# Altium PCB 50AN Digi.PcbDoc
Units mm, origin at the board's own origin, x right, y up, seen from the top; angles counter-clockwise.
Board outline 64.8 x 52.21 mm, 2 copper layers (Top Layer, Bottom Layer), stack 1.651 mm thick; 36 components, 42 nets, 186 pads, 22 vias.
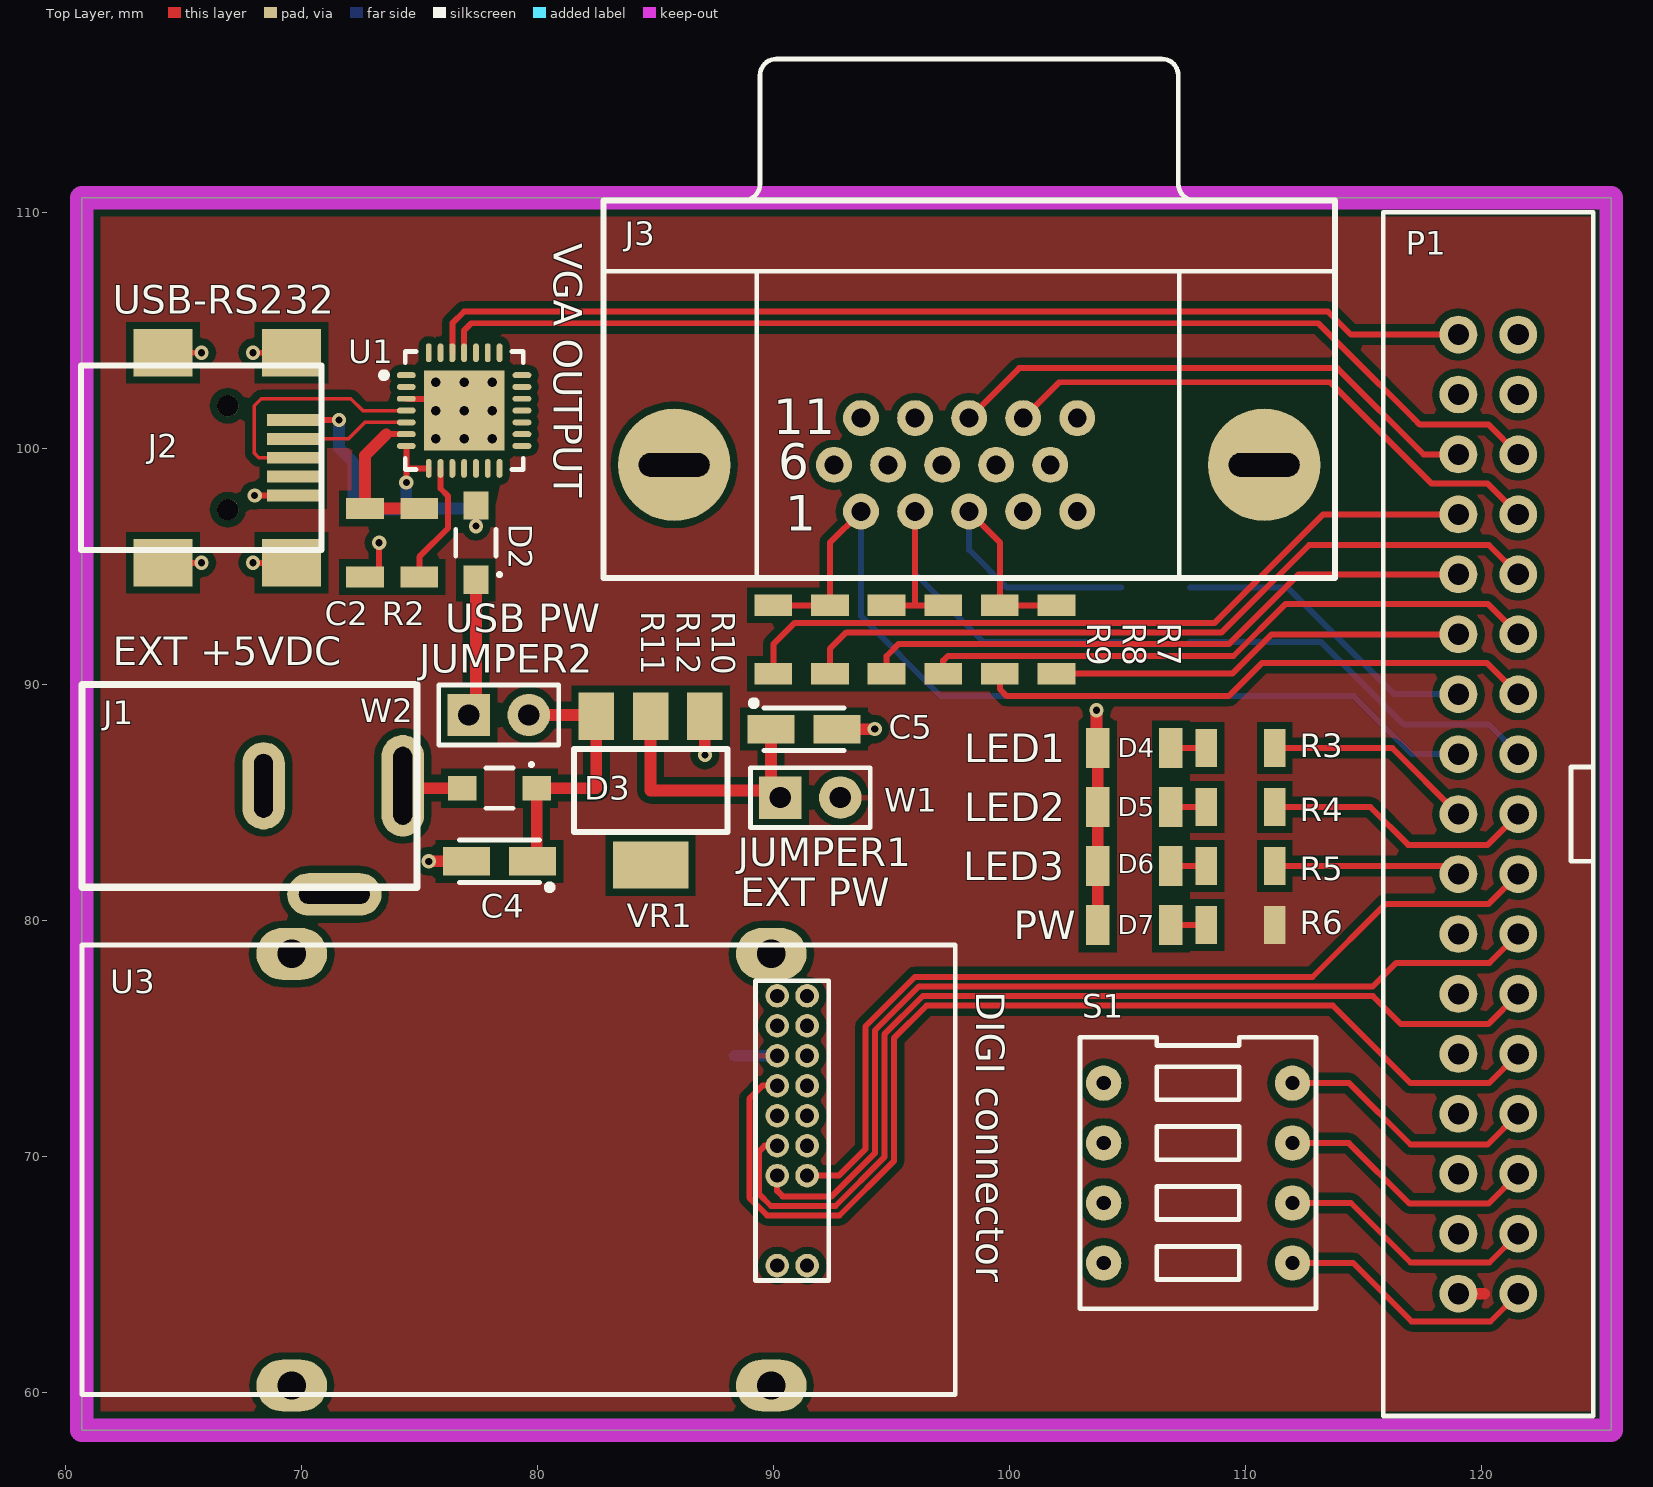
[diagram p0: Top Layer view]
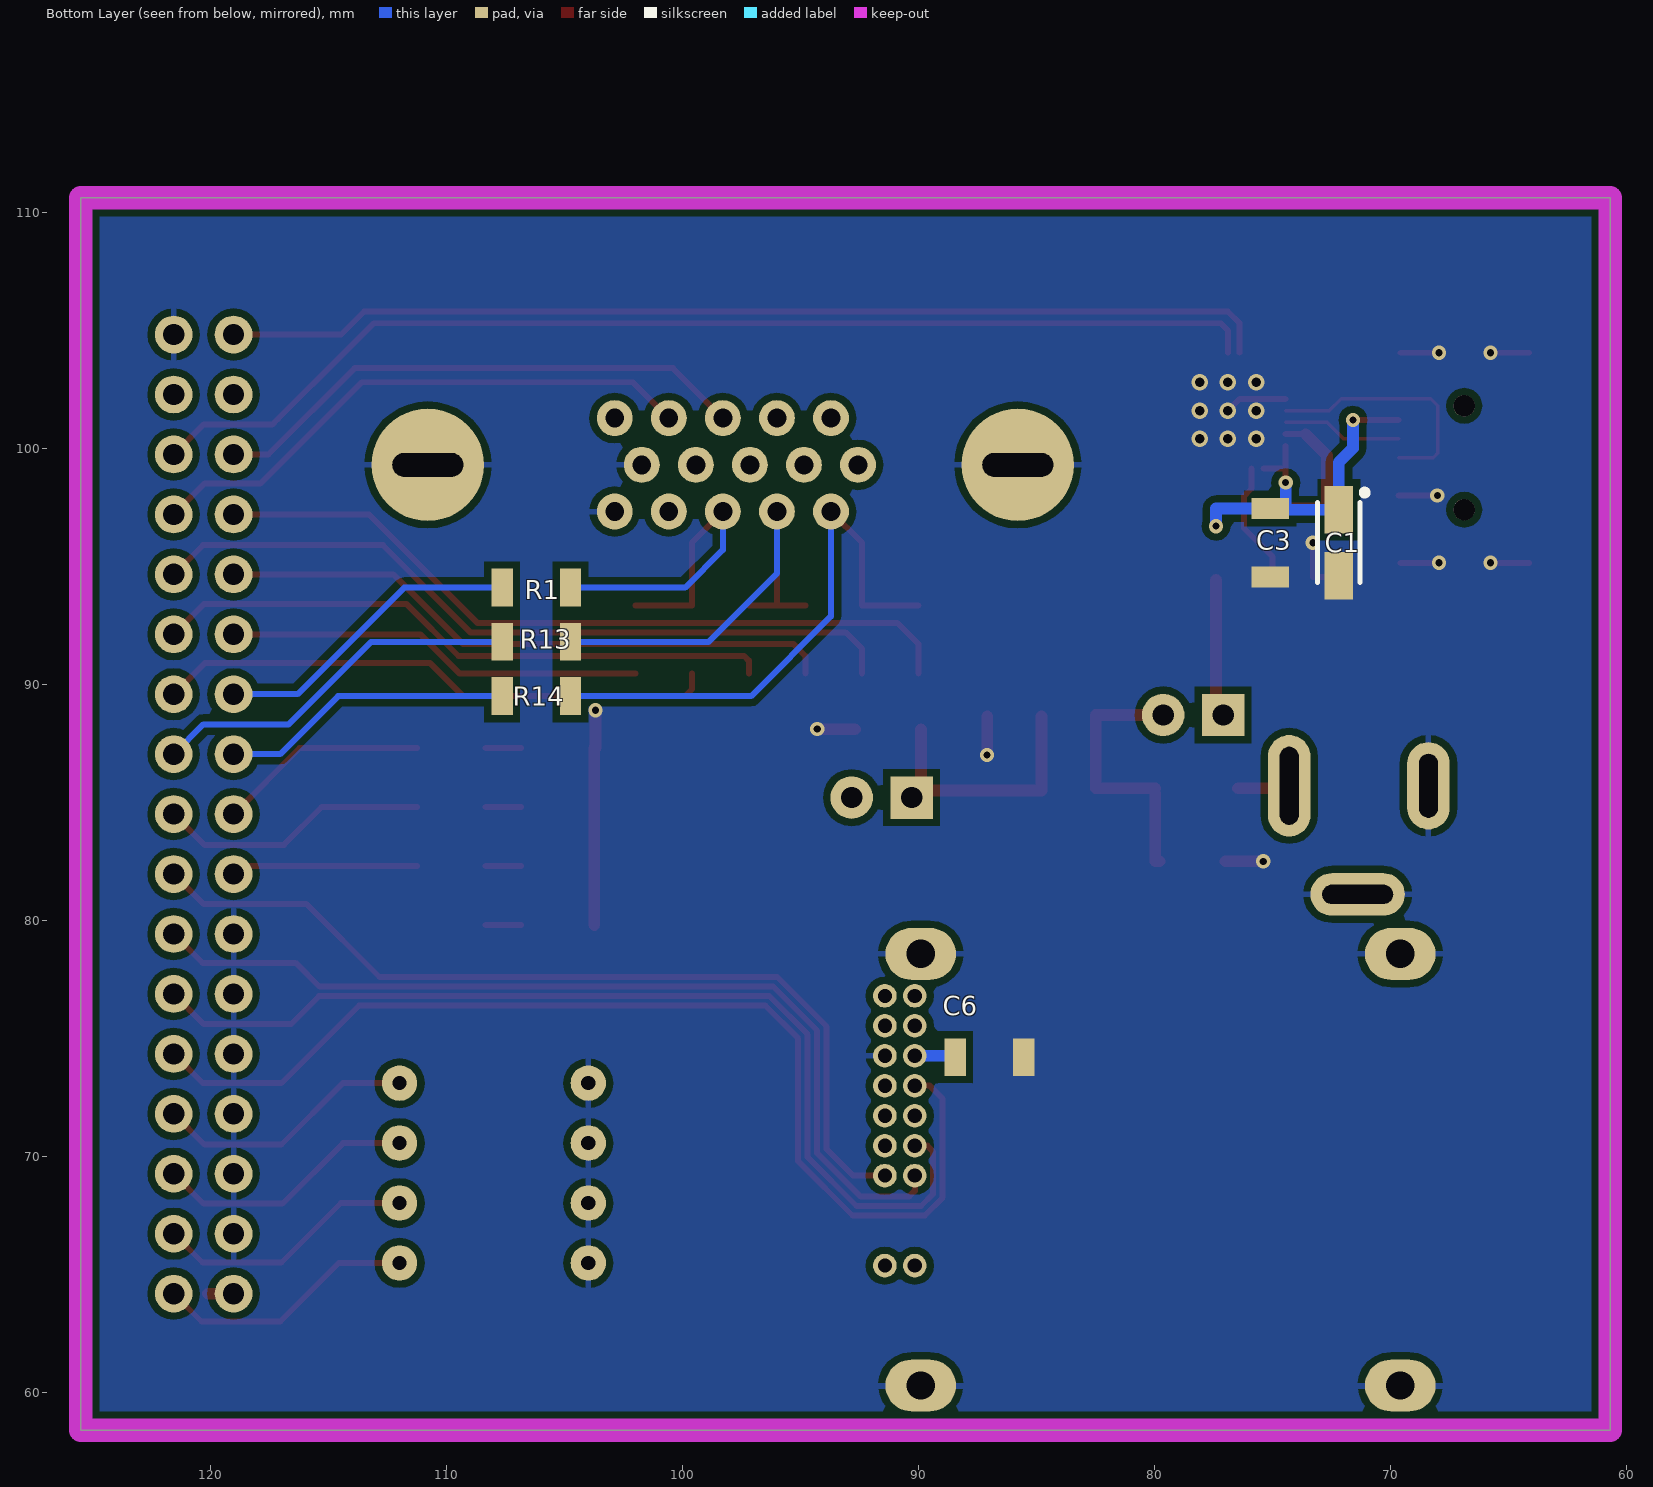
[diagram p1: Bottom Layer view, seen from below]

## Layer stack, top to bottom
Top Layer: signal copper 0.0356
Dielectric: core 1.58, FR-4, Dk 4.8
Bottom Layer: signal copper 0.0356

## Board outline
60.7,58.4 125.5,58.4 125.5,110.613 60.7,110.613

## Design rules (kind name [scope] priority, off if disabled: settings)
Clearance ClearancePoly [(IsRegion)] p1: gap=0.3
Clearance [(ObjectKind <> 'Region')] p2: gap=0.15
ComponentClearance [All] p1: gap=0.25 collisioncheckmode=3 verticalgap=0.25 showdistances=FALSE
HoleSize [All] p1: absolutevalues=TRUE maxlimit=4 minlimit=0.3 maxpercent=80.000 minpercent=20.000
HoleSize Testpoint [All] p2: absolutevalues=TRUE maxlimit=2.54 minlimit=0.025 maxpercent=80.000 minpercent=20.000
HoleSize TestPointUsage [All] p3: absolutevalues=TRUE maxlimit=2.54 minlimit=0.025 maxpercent=80.000 minpercent=20.000
HoleToHoleClearance [All] p1: gap=0 allowstackedmicrovias=TRUE
MinimumSolderMaskSliver [All] p1: minsoldermaskwidth=0
NetAntennae [All] p1: netantennaetolerance=10
PlaneClearance [All] p1: clearance=0.15
PlaneConnect PlaneConnectSMD [(ObjectKind = 'Pad') And (Layer <> 'MultiLayer')] p1: planeconnectstyle=Direct reliefexpansion=0.508 reliefentries=4 reliefconductorwidth=0.254 reliefairgap=0.254
PlaneConnect PlaneConnectLeadedPad [(ObjectKind = 'Pad') And (Layer = 'MultiLayer')] p2: planeconnectstyle=Relief reliefexpansion=0.508 reliefentries=2 reliefconductorwidth=0.254 reliefairgap=0.254
PlaneConnect PlaneConnectVia [IsVia] p3: planeconnectstyle=Direct reliefexpansion=0.508 reliefentries=4 reliefconductorwidth=0.254 reliefairgap=0.254
PolygonConnect PolygonConnectSMD [(ObjectKind = 'Pad') And (Layer <> 'MultiLayer')] p1: connectstyle=Direct reliefconductorwidth=0.254 reliefentries=4 polygonreliefangle="90 Angle"
PolygonConnect PolygonConnectLeadedPad [(ObjectKind = 'Pad') And (Layer = 'MultiLayer')] p2: connectstyle=Relief reliefconductorwidth=0.254 reliefentries=2 polygonreliefangle="90 Angle"
PolygonConnect PolygonConnectVia [IsVia] p3: connectstyle=Direct reliefconductorwidth=0.254 reliefentries=4 polygonreliefangle="90 Angle"
RoomDefinition 50AN_DIGI [InComponentClass('50AN_DIGI')] p1: confinementstyle=ConfineOut formatcopy=TRUE lockcomponents=FALSE outline 126.6,58.3 137.2,58.3 137.2,71.9 126.6,71.9
RoutingVias [All] p1: holewidth=0.3 width=0.6 viastyle="Through Hole" minholewidth=0.3 minwidth=0.6 maxholewidth=0.8 maxwidth=1.5
SilkToSilkClearance [All] p1: silktosilkclearance=0
SilkscreenOverComponentPads [All] p1: minsilkscreentomaskgap=0
SolderMaskExpansion [All] p1: expansion=0.102
Width [All] p1: maxlimit=2 minlimit=0.15 preferedwidth=0.254
19 further rules are at their usual default settings.

## Classes and differential pairs
component class 50AN_DIGI: C1 C2 C3 C4 C5 C6 D1 D2 D3 D4 D5 D6 D? J1 J2 J3 P1 R1 R2 R3 R4 R5 R6 R7 R8 R9 R10 S1 U1 U2 VR1 W1 W2

## Components (designator, comment, footprint, x,y, rotation, side; value= is the part's Value field where it differs from the comment)
C1 "Tan" "Tantal size A" 72.2,96 r270 bottom
C2 "1206" 1206C 72.7,96 r90 top
C3 "1206" 1206C 75.1,96 r90 bottom
C4 "Tan" "Tantal size A" 78.4,82.5 r180 top
C5 "Tan" "Tantal size A" 91.3,88.1 r0 top
C6 "1206" 1206C 87,74.2 r0 bottom
D2 "CRS08" CRS08 77.4,96 r270 top
D3 "CRS08" CRS08 78.4,85.6 r0 top
D4 "Green" LED1206G 105.3,87.3 r180 top
D5 "Yellow" LED1206Y 105.3,84.8 r180 top
D6 "Red" LED1206R 105.3,82.3 r180 top
D7 "Green" LED1206G 105.3,79.8 r180 top
J1 "PWR2.0" "DC FATN Ø2.0" 68.4,85.7 r270 top
J2 "USB mini socket" "Mini USB SMD F:1243250" 66.9,99.6 r270 top
J3 "D Connector 15" "HDSUB 15" 98.3,99.3 r0 top
P1 "Header 17X2" "50AN HDR2X17" 120.3,84.5 r0 top locked
R1 "1206" 1206R 106.2,94.1 r180 bottom
R2 "1206" 1206R 75,96 r270 top
R3 "1206" 1206R 109.8,87.3 r180 top
R4 "1206" 1206R 109.8,84.8 r180 top
R5 "1206" 1206R 109.8,82.3 r180 top
R6 "1206" 1206R 109.8,79.8 r180 top
R7 "1206" 1206R 102,91.9 r90 top
R8 "1206" 1206R 99.6,91.9 r90 top
R9 "1206" 1206R 97.2,91.9 r90 top
R10 "1206" 1206R 94.8,91.9 r90 top
R11 "1206" 1206R 90,91.9 r90 top
R12 "1206" 1206R 92.4,91.9 r90 top
R13 "1206" 1206R 106.2,91.8 r180 bottom
R14 "1206" 1206R 106.2,89.5 r180 bottom
S1 "SW-DIP4" "DIP SW 4" 108,73.1 r270 top
U1 "CP2102" MLP-28 76.9,101.6 r0 top
U3 "Digi ME" "Digi Connect ME" 89,76.8 r0 top
VR1 "LM1117" SOT-223 84.8,85.5 r180 top
W1 "Jumper" HDR1X2 90.3,85.2 r0 top
W2 "Jumper" HDR1X2 77.1,88.7 r0 top

## Footprints (in the part's own frame and the unit in brackets; to place one, negate y for a bottom-side part, rotate by r counter-clockwise, add the part's x,y. Pads: shape width x height; smd on the part's side, far side on the other; paste and mask are expansions set on the pad)
"50AN HDR2X17" [mm]
  round 1.6 hole 0.9: 1(1.27,20.32) 2(-1.27,20.32) 3(1.27,17.78) 4(-1.27,17.78) 5(1.27,15.24) 6(-1.27,15.24) 7(1.27,12.7) 8(-1.27,12.7) 9(1.27,10.16) 10(-1.27,10.16) 11(1.27,7.62) 12(-1.27,7.62) 13(1.27,5.08) 14(-1.27,5.08) 15(1.27,2.54) 16(-1.27,2.54) 17(1.27,0) 18(-1.27,0) 19(1.27,-2.54) 20(-1.27,-2.54) 21(1.27,-5.08) 22(-1.27,-5.08) 23(1.27,-7.62) 24(-1.27,-7.62) 25(1.27,-10.16) 26(-1.27,-10.16) 27(1.27,-12.7) 28(-1.27,-12.7) 29(1.27,-15.24) 30(-1.27,-15.24) 31(1.27,-17.78) 32(-1.27,-17.78) 33(1.27,-20.32) 34(-1.27,-20.32)
  silkscreen extent -4.45,-25.5 4.45,25.5, body extent -5.08,-37.98 45.72,26.67, height 25.51
1206C [mm] "Reflow footprint"
  rect 0.9x1.6 smd: 1(-1.45,0) 2(1.45,0)
  body extent -1.5,-0.75 1.5,0.75, height 0.5
1206R [mm] "Reflow footprint"
  rect 0.9x1.6 smd: 1(-1.45,0) 2(1.45,0)
  body extent -1.5,-0.75 1.5,0.75, height 0.5
CRS08 [mm] "Molded Diode 1.5A low vf"
  rect 1.2x1.05 smd: 1(-1.575,0) 2(1.575,0)
  silkscreen extent -0.58,-0.85 1.4,1.05, body extent -1.3,-0.8 1.3,0.8, height 1
"DC FATN Ø2.0" [mm] "Lager"
  oval 4.3x1.8 hole 0.8 slot 3.3 at 0 deg: 1(0,5.9)
  oval 3.7x1.8 hole 0.8 slot 2.7 at 0 deg: 2(0,0)
  oval 1.8x4 hole 0.8 slot 3 at 90 deg: 3(4.6,3)
  silkscreen extent -4.3,-7.7 4.3,6.5, body extent -4.5,-7.7 5,6.13, height 11
"Digi Connect ME" [mm]
  round 1 hole 0.6: 1(1.165,-11.43) 2(2.435,-11.43) 7(1.165,-7.62) 8(2.435,-7.62) 9(1.165,-6.35) 10(2.435,-6.35) 11(1.165,-5.08) 12(2.435,-5.08) 13(1.165,-3.81) 14(2.435,-3.81) 15(1.165,-2.54) 16(2.435,-2.54) 17(1.165,-1.27) 18(2.435,-1.27) 19(1.165,0) 20(2.435,0)
  oval 3x2.2 hole 1.2: 23(-19.405,-16.512) 23(-19.405,1.778) 23(0.915,-16.512) 23(0.915,1.778)
  silkscreen extent -28.3,-16.89 8.7,2.16, body extent -28.3,-16.89 8.7,2.16, height 18.5
"DIP SW 4" [mm] "4 Pol Leaded Dip Switch"
  round 1.5 hole 0.6: 1(0,-4) 2(2.54,-4) 3(5.08,-4) 4(7.62,-4) 5(7.62,4) 6(5.08,4) 7(2.54,4) 8(0,4)
  silkscreen extent -1.94,-5 9.56,5, body extent -2.05,-5.08 9.63,5.08, height 6.9
HDR1X2 [mm]
  rect 1.8x1.8 hole 0.9: 1(0,0)
  round 1.8 hole 0.9: 2(2.54,0)
  silkscreen extent -1.27,-1.27 3.81,1.27, body extent -1.27,-1.27 3.81,1.27, height 8.51
"HDSUB 15" [mm] "VGA HUN"
  round 1.524 hole 0.8: 1(-4.58,-1.98) 2(-2.29,-1.98) 3(0,-1.98) 4(2.29,-1.98) 5(4.58,-1.98) 6(-5.725,0) 7(-3.435,0) 8(-1.145,0) 9(1.145,0) 10(3.435,0) 11(-4.58,1.98) 12(-2.29,1.98) 13(0,1.98) 14(2.29,1.98) 15(4.58,1.98)
  round 4.76 hole 1 slot 3 at 0 deg: 16(-12.5,0) 17(12.5,0)
  silkscreen extent -15.5,-4.8 15.5,17.2
LED1206G [mm] "MELF-R3216-1206 modificeret med diode symbol"
  round 0.4 on Top Overlay: 0(2.5,0.8)
  rect 1x1.7 smd: 1(-1.55,0) 2(1.55,0)
  body extent -1.6,-0.8 1.6,0.8, height 1.11
LED1206R [mm] "MELF-R3216-1206 modificeret med diode symbol"
  round 0.4 on Top Overlay: 0(2.5,0.8)
  rect 1x1.7 smd: 1(-1.55,0) 2(1.55,0)
  body extent -1.6,-0.8 1.6,0.8, height 1.11
LED1206Y [mm] "MELF-R3216-1206 modificeret med diode symbol"
  round 0.4 on Top Overlay: 0(2.5,0.8)
  rect 1x1.7 smd: 1(-1.55,0) 2(1.55,0)
  body extent -1.6,-0.8 1.6,0.8, height 1.11
"Mini USB SMD F:1243250" [mm]
  rect 0.5x2.25 smd: 1(-1.6,2.763) 2(-0.8,2.763) 3(0,2.763) 4(0.8,2.763) 5(1.6,2.763)
  rect 2x2.5 smd: 5(-4.45,2.688) 5(-4.45,-2.762) 5(4.45,2.688) 5(4.45,-2.762)
  round 0.9 hole 0.9 unplated: ""(-2.2,-0.012) ""(2.2,-0.012)
  silkscreen extent -3.9,-6.24 3.9,3.96, body extent -5.35,-5.9 5.35,3.3, height 3.95
MLP-28 [mm] "QFN, 28-Leads, Body 5,0x5,0mm (max), Pitch 0,50mm, IPC Medium Density"
  oval 0.8x0.25 smd: 1(-2.45,1.5) 2(-2.45,1) 3(-2.45,0.5) 4(-2.45,0) 5(-2.45,-0.5) 6(-2.45,-1) 7(-2.45,-1.5) 15(2.45,-1.5) 16(2.45,-1) 17(2.45,-0.5) 18(2.45,0) 19(2.45,0.5) 20(2.45,1) 21(2.45,1.5)
  oval 0.25x0.8 smd: 8(-1.5,-2.45) 9(-1,-2.45) 10(-0.5,-2.45) 11(0,-2.45) 12(0.5,-2.45) 13(1,-2.45) 14(1.5,-2.45) 22(1.5,2.45) 23(1,2.45) 24(0.5,2.45) 25(0,2.45) 26(-0.5,2.45) 27(-1,2.45) 28(-1.5,2.45)
  rect 3.4x3.4 smd: 29(0,0)
  silkscreen extent -3.52,-2.5 2.5,2.5, body extent -2.5,-2.5 2.5,2.5, height 1
SOT-223 [mm]
  rect 1.5x2 smd: 1(-2.3,-3.15) 2(0,-3.15) 3(2.3,-3.15)
  rect 3.2x2 smd: 4(0,3.15)
  silkscreen extent -3.25,-1.75 3.25,1.75, body extent -3.25,-3.47 3.25,3.47, height 1.64
"Tantal size A" [mm] "Capacitor, SM Tantalum; Body 3.2 x 1.6 mm (LxW typ)"
  rect 2x1.2 smd: 1(-1.4,0) 2(1.4,0)
  silkscreen extent -2.25,-0.9 1.7,1.22, body extent -1.6,-0.8 1.6,0.8, height 1.61

## Part data
C1 C4 C5: library part "Cap Pol1", "Polarized Capacitor (Radial)"
C2 C3 C6: library part Cap, "Capacitor"
D2 D3: library part "Diode 11DQ03", "Schottky Rectifier"
D4 D5 D6 D7: library part LED0
J1: library part PWR2.5, "Low Voltage Power Supply Connector"
J3: "Receptacle Assembly, 15 Position, Right Angle"
P1: "Header, 17-Pin, Dual row"
R1 R2 R3 R4 R5 R6 R7 R8 R9 R10 R11 R12 R13 R14: library part Res2, "Resistor"
S1: "DIP Switch"
U1: "USB-TO-UART BRIDGE"
U3: "Digi One ME connector"
VR1: "800mA Low-Dropout Linear Regulator"
W1 W2: "Jumper Wire"

## Via types
v1: diameter 0.6, hole 0.3, Top Layer to Bottom Layer, tented both sides, 13 vias
v2: diameter 0.7, hole 0.4, Top Layer to Bottom Layer, tented bottom, 9 vias

## Nets (pads, with @x,y where several pads share a name; then routed paths per layer and width w, separated by ;. In a path a pad name is that pad's centre, name@x,y a point inside that pad or via, vN(x,y) a via of type N, cw(c..) or ccw(c..) an arc to the next point about the centre after c; other vN are vias at no path point)
3.3VDC: C6.2 P1.34 R6.1 U3.15 W1.2 | length 2.9
  Top Layer w0.5: P1.34 120.12,64.18
  Bottom Layer w0.5: C6.2@88.35,74.26 U3.15 U3.15@90.165,74.3
+DATA: J2.3 U1.4 | length 10.5
  Top Layer w0.15: J2.3 68.2,99.6 68,99.8 68,101.8 68.3,102.1 72.1,102.1 72.6,101.6 U1.4
-DATA: J2.2 U1.5 | length 5.1
  Top Layer w0.15: J2.2 72,100.4 72.7,101.1 U1.5
DCD: P1.25 U3.13 | length 47.1
  Top Layer w0.254: U3.13 89.54,72.99 88.984,72.434 88.984,68.245 89.737,67.492 92.806,67.492 95.112,69.798 95.112,74.998 96.502,76.388 112.602,76.388 113.712,76.388 117,73.1 120.33,73.1 P1.25
DIPSW1: P1.27 S1.8 | length 11.2
  Top Layer w0.254: S1.8 114.4,73.1 117,70.5 120.27,70.5 P1.27
DIPSW2: P1.29 S1.7 | length 11.2
  Top Layer w0.254: S1.7 114.39,70.56 116.95,68 120.31,68 P1.29
DIPSW3: P1.31 S1.6 | length 11.1
  Top Layer w0.254: S1.6 114.48,68.02 117,65.5 120.35,65.5 P1.31
DIPSW4: P1.33 S1.5 | length 11.1
  Top Layer w0.254: S1.5 114.57,65.48 117.05,63 120.39,63 P1.33
GND: C1.2 C2.1 C3.1 C4.2 C5.2 C6.1 D4.2 D5.2 D6.2 D7.2 J1.2 J1.3 J2.5 J3.5 J3.10 J3.16 J3.17 P1.1 P1.22 P1.24 P1.26 P1.28 P1.30 P1.32 S1.1 S1.2 S1.3 S1.4 U1.3 U1.29 U3.16 U3.23 VR1.1 | length 26.8
  Top Layer w0.254: J2.5@64.138,95.15 v1(65.775,95.15) ; J2.5@64.138,104.05 v1(65.775,104.05) ; v1(67.95,95.15) J2.5@69.588,95.15 ; v1(67.95,104.05) J2.5@69.588,104.05 ; v1(68.025,98) J2.5@69.662,98 ; C2.1 73.3,94.55 v1(73.3,96) ; U1.3 76.4,102.1 v2(76.9,101.6)
  Top Layer w0.5: v1(75.4,82.5) C4.2 ; v1(87.1,87) VR1.1 ; C5.2 v1(94.3,88.1) ; D4.2@103.7,87.3 v1(103.7,88.9) ; D7.2 D4.2
  other v2: 75.7,100.4 76.9,100.4 78.1,100.4 75.7,101.6 78.1,101.6 75.7,102.8 76.9,102.8 78.1,102.8
LED1: P1.18 R3.1 | length 8.9
  Top Layer w0.254: R3.1 116.23,87.3 P1.18
LED2: P1.17 R4.1 | length 11.5
  Top Layer w0.254: R4.1 115.3,84.8 116.9,83.2 120.27,83.2 P1.17
LED3: P1.20 R5.1 | length 7.9
  Top Layer w0.254: R5.1 118.69,82.3 P1.20
NetC4_1: C4.1 D3.2 VR1.3 W2.2 | length 12
  Top Layer w0.5: W2.2 82.5,88.7 VR1.3 ; C4.1 79.975,82.5 D3.2@79.975,85.4 ; D3.2 82.5,85.6 VR1.3 ; VR1.3@82.5,88.2 VR1.3
NetC5_1: C5.1 VR1.2 W1.1 | length 10.8
  Top Layer w0.5: VR1.2 84.8,85.5 89.9,85.5 C5.1
NetD2_2: D2.2 W2.1 | length 6
  Top Layer w0.5: W2.1 77.4,88.7 D2.2
NetD3_1: D3.1 J1.1 | length 2.4
  Top Layer w0.254: D3.1@76.475,85.6 D3.1@76.475,85.7
  Top Layer w0.5: J1.1 74.3,85.6 D3.1@76.475,85.6
NetD4_1: D4.1 R3.2 | length 1.5
  Top Layer w0.254: D4.1 R3.2
NetD5_1: D5.1 R4.2 | length 1.5
  Top Layer w0.254: D5.1 R4.2
NetD6_1: D6.1 R5.2 | length 1.5
  Top Layer w0.254: D6.1 R5.2
NetD7_1: D7.1 R6.2 | length 1.5
  Top Layer w0.254: D7.1 R6.2
NetJ3_1: J3.1 R11.2 R12.2 R14.2 | length 23.8
  Top Layer w0.254: R11.2 R12.2 92.4,96 J3.1
  Bottom Layer w0.254: J3.1 93.72,92.88 97.1,89.5 R14.2
NetJ3_2: J3.2 R9.2 R10.2 R13.2 | length 19
  Top Layer w0.254: R10.2 R9.2 ; J3.2 96.01,93.35 96.075,93.35
  Bottom Layer w0.254: J3.2 96.01,94.69 98.9,91.8 R13.2
NetJ3_3: J3.3 R1.2 R7.2 R8.2 | length 15.6
  Top Layer w0.254: J3.3 99.6,96.02 R8.2 R7.2
  Bottom Layer w0.254: J3.3 98.3,95.7 99.9,94.1 R1.2
NetR2_2: R2.2 U1.9 | length 5.2
  Top Layer w0.254: R2.2 75,95.4 76.225,96.625 76.225,97.975 75.9,98.3 U1.9
RTS: P1.23 U3.9 | length 42.8
  Top Layer w0.254: U3.9 89.638,70.45 89.388,70.2 89.388,68.412 89.904,67.896 92.639,67.896 94.708,69.965 94.708,75.165 96.335,76.792 112.435,76.792 115.408,76.792 116.6,75.6 120.29,75.6 P1.23
RXD: P1.21 U3.7 | length 39.8
  Top Layer w0.254: U3.7 90.165,68.535 90.4,68.3 92.471,68.3 94.304,70.133 94.304,75.333 96.167,77.196 112.267,77.196 115.396,77.196 116.4,78.2 120.35,78.2 P1.21
TXD: P1.19 U3.8 | length 38.5
  Top Layer w0.254: U3.8 92.78,69.18 93.9,70.3 93.9,75.5 96,77.6 101.5,77.6 112.1,77.6 112.85,77.6 115.95,80.7 120.31,80.7 P1.19
USB_RS232_RX: P1.2 U1.26 | length 44.6
  Top Layer w0.254: U1.26 76.4,105.3 76.9,105.8 113.5,105.8 114.48,104.82 P1.2@119.1,104.82
USB_RS232_TX: P1.5 U1.25 | length 48
  Top Layer w0.254: U1.25 76.9,105 77.2,105.3 113.1,105.3 114.3,104.1 117.15,101.25 117.4,101 120.31,101 P1.5
USB_VDD: C2.2 R2.1 U1.6 | length 6.7
  Top Layer w0.254: 73.6,100.6 U1.6
  Top Layer w0.5: 73.6,100.6 72.7,99.7 C2.2 R2.1
VBUS_USB: C1.1 C3.2 D2.1 J2.1 U1.7 U1.8 | length 14.8
  Top Layer w0.254: J2.1 v1(71.6,101.2) ; v1@74.45,98.75 U1.7 ; 74.45,99.2 74.45,99.15 U1.8
  Bottom Layer w0.254: C3.2@75.05,97.4 C3.2 C3.2@75.05,97.5
  Bottom Layer w0.5: v1(71.6,101.2) 71.6,100 72.2,99.4 C1.1 ; C1.1@72.8,97.4 C3.2@75.05,97.4 ; C3.2@74.45,97.5 v1(74.45,98.55) ; C3.2 76.75,97.45 77.4,97.45 v1(77.4,96.7)
VGA_BLUE_D0: P1.12 R7.1 | length 17.7
  Top Layer w0.254: R7.1 109.45,90.45 111.12,92.12 P1.12
VGA_BLUE_D1: P1.13 R8.1 | length 23.9
  Top Layer w0.254: R8.1 99.6,89.8 99.9,89.5 109.3,89.5 110.7,90.9 120.25,90.9 P1.13
VGA_BLUE_D2: P1.14 R1.1 | length 13.3
  Bottom Layer w0.254: R1.1 111.8,94.1 116.32,89.58 P1.14
VGA_GREEN_D0: P1.11 R9.1 | length 26.4
  Top Layer w0.254: R9.1 97.2,91 97.4,91.2 104.6,91.2 109.5,91.2 111.7,93.4 120.29,93.4 P1.11
VGA_GREEN_D1: P1.10 R10.1 | length 26.4
  Top Layer w0.254: R10.1 94.8,91.2 95.3,91.7 104.6,91.7 109.3,91.7 112.26,94.66 P1.10
VGA_GREEN_D2: P1.15 R13.1 | length 15.9
  Bottom Layer w0.254: R13.1 113.2,91.8 116.7,88.3 120.31,88.3 P1.15
VGA_HSYNC: J3.13 P1.6 | length 23.1
  Top Layer w0.254: J3.13 100.42,103.4 113.9,103.4 117.56,99.74 P1.6
VGA_RED_D0: P1.8 R11.1 | length 32.6
  Top Layer w0.254: R11.1 90,91.7 90.904,92.604 104.4,92.604 108.704,92.604 113.3,97.2 P1.8
VGA_RED_D1: P1.9 R12.1 | length 32.6
  Top Layer w0.254: R12.1 92.4,91.5 93.1,92.2 104.5,92.2 109,92.2 112.7,95.9 120.33,95.9 P1.9
VGA_RED_D2: P1.16 R14.1 | length 12.4
  Bottom Layer w0.254: R14.1 114.6,89.5 117.06,87.04 P1.16
VGA_VSYNC: J3.14 P1.7 | length 23.9
  Top Layer w0.254: J3.14 102.11,102.8 103.7,102.8 113.6,102.8 117.9,98.5 120.27,98.5 P1.7
pads on no net: D4.0 D5.0 D6.0 D7.0 J2. J2.4 J3.4 J3.6 J3.7 J3.8 J3.9 J3.11 J3.12 J3.15 P1.3 P1.4 U1.1 U1.2 U1.10 U1.11 U1.12 U1.13 U1.14 U1.15 U1.16 U1.17 U1.18 U1.19 U1.20 U1.21 U1.22 U1.23 U1.24 U1.27 U1.28 U3.1 U3.2 U3.10 U3.11 U3.12 U3.14 U3.17 U3.18 U3.19 U3.20 VR1.4

## Polygon pours and split planes (outlines as drawn)
3.3VDC on Top Layer "Top layer_3.3VDC" (solid, remove dead copper, pour order 1001): 60.7,110.613 60.7,58.4 125.5,58.4 125.5,110.6
GND on Bottom Layer "Bottom layer_GND" (solid, remove dead copper, pour order 1000): 60.7,110.613 60.7,58.4 125.5,58.4 125.5,110.6

## Keep-outs
Keep-Out Layer:
  the board outline again, w1

## Silkscreen, mask and mechanical layers (free items; w line width, h text height)
Top Overlay:
  text "VGA OUTPUT" at 80.7,108.7 h1.2 r270
  text "USB-RS232" at 62,105.7 h1.2
  text "USB PW" at 76.1,92.2 h1.2
  text "EXT +5VDC" at 62,90.8 h1.2
  text "JUMPER2" at 75,90.5 h1.2
  text "LED1" at 98.1,86.7 h1.2
  text "LED2" at 98.1,84.2 h1.2
  text "JUMPER1" at 88.5,82.3 h1.2
  text "LED3" at 98.05,81.7 h1.2
  text "EXT PW" at 88.6,80.6 h1.2
  text "PW" at 100.2,79.2 h1.2
  text "DIGI connector" at 98.6,77 h1.2 r270
Bottom Solder:
  text "R1" at 106.8,99.1 h1.2
  text "R13" at 107.5,97.4 h1.2
  text "R14" at 107.5,95.6 h1.2
  text "C3" at 71.6,90.9 h1.2 r270
  text "C1" at 74.5,90.9 h1.2 r270
  text "C6" at 84.3,73.6 h1.2

## Text inside footprints (layer, text, board x,y; h text height)
J3: Top Overlay "1" at 90.5,96.5 h1.5; Top Overlay "11" at 90,100.6 h1.5; Top Overlay "6" at 90.2,98.7 h1.5